# Altium PCB MAXstream.PcbDoc
Units mil, origin at the board's own origin, x right, y up, seen from the top; angles counter-clockwise.
Board outline not stored, 2 copper layers (Top Layer, Bottom Layer); 9 components, 0 nets, 36 pads, 6 vias.
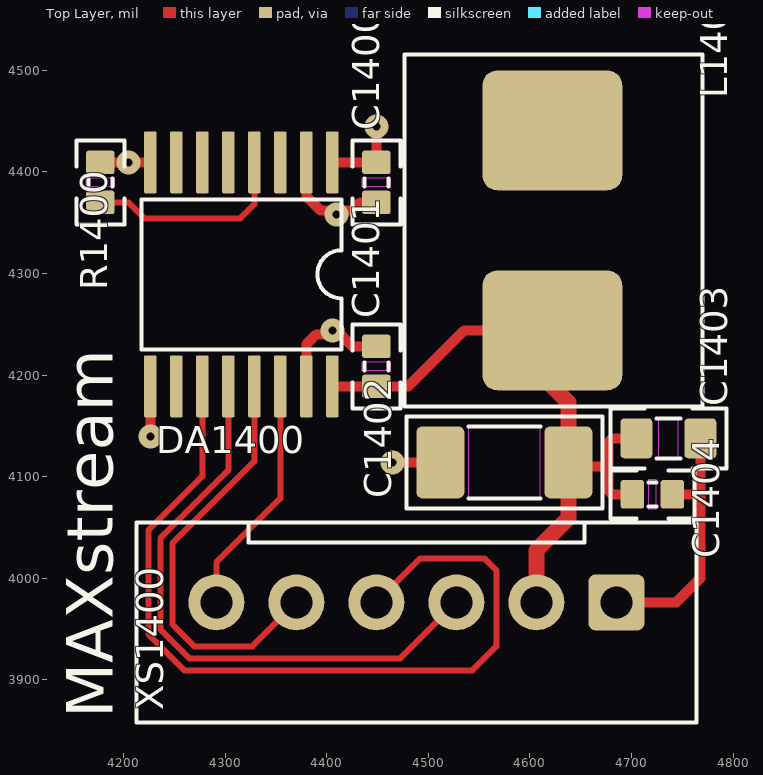
[diagram p0: Top Layer view]
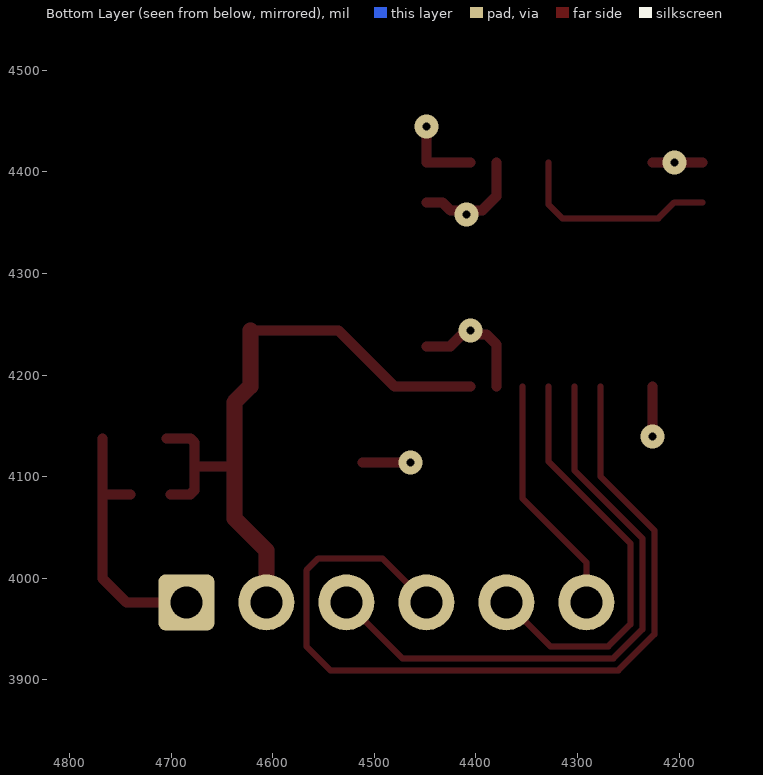
[diagram p1: Bottom Layer view, seen from below]

## Layer stack, top to bottom
Top Solder: solder mask 0.4, Solder Resist, Dk 3.5
Top Layer: signal copper 1.4
Dielectric 1: dielectric 12.6, FR-4, Dk 4.8
Bottom Layer: signal copper 1.4
Bottom Solder: solder mask 0.4, Solder Resist, Dk 3.5

## Design rules (kind name [scope] priority, off if disabled: settings)
RoomDefinition MAXstream [InComponentClass('Components Class 1')] p1: confinementstyle=ConfineIn formatcopy=TRUE lockcomponents=FALSE outline 4129.92,3803.15 4838.58,3803.15 4838.58,4551.18 4129.92,4551.18

## Components (designator, comment, footprint, x,y, rotation, side; value= is the part's Value field where it differs from the comment)
C1400 "0,1" CAP0402 4448.82,4389.76 r270 top
C1401 "0,1" CAP0402 4448.82,4208.66 r90 top
C1402 "47,0" CAP1206 4574.8,4114.17 r180 top
C1403 "2,2" CAP0603 4736.22,4137.8 r0 top
C1404 "0,1" CAP0402 4720.47,4082.68 r0 top
DA1400 "ISO7141" TSSOP16 4405.51,4409.45 r270 top
L1400 "10uH" IND2525 4622.05,4342.52 r270 top
R1400 "10K" RES0402 4177.17,4389.76 r90 top
XS1400 "MAXstream" MW-6M 4685.04,3976.38 r180 top

## Footprints (in the part's own frame and the unit in brackets; to place one, negate y for a bottom-side part, rotate by r counter-clockwise, add the part's x,y. Pads: shape width x height; smd on the part's side, far side on the other; paste and mask are expansions set on the pad)
CAP0402 [mm]
  rrect25% 0.59x0.72 smd: 1(-0.5,0) 2(0.5,0)
  Top Layer keep-out region: -0.1,0.36 -0.1,-0.36 0.1,-0.36 0.1,0.36
  silkscreen extent -1.05,-0.6 1.05,0.6, body extent -0.5,-0.25 0.5,0.25, height 0.49
CAP0603 [mm]
  rrect25% 0.8x1 smd: 1(-0.8,0) 2(0.8,0)
  Top Layer keep-out region: -0.25,0.5 -0.25,-0.5 0.25,-0.5 0.25,0.5
  silkscreen extent -1.45,-0.75 1.45,0.75, body extent -0.8,-0.4 0.8,0.4, height 0.65
CAP1206 [mm]
  rrect25% 1.2x1.8 smd: 1(-1.6,0) 2(1.6,0)
  Top Layer keep-out region: -0.9,-0.9 0.9,-0.9 0.9,0.9 -0.9,0.9
  silkscreen extent -2.45,-1.15 2.45,1.15, body extent -1.6,-0.8 1.6,0.8, height 1
IND2525 [mm]
  rrect25% 3x3.5 smd: 1(-2.5,0) 2(2.5,0)
  silkscreen extent -4.4,-3.7 4.4,3.75, body extent -3.68,-3.39 3.6,3.39, height 4.99
MW-6M [mm]
  rrect25% 1.4x1.4 hole 0.8: 1(0,0)
  round 1.4 hole 0.8: 2(2,0) 3(4,0) 4(6,0) 5(8,0) 6(10,0)
  silkscreen extent -2,-2 12,3, body extent -2,-1.75 12,2.75, height 6
RES0402 [mm]
  rrect25% 0.59x0.72 smd: 1(-0.5,0) 2(0.5,0)
  Top Layer keep-out region: -0.1,0.36 -0.1,-0.36 0.1,-0.36 0.1,0.36
  silkscreen extent -1.05,-0.6 1.05,0.6, body extent -0.5,-0.25 0.5,0.25, height 0.33
TSSOP16 [mm]
  rrect25% 1.55x0.32 smd: 1(0,0) 2(0,-0.65) 3(0,-1.3) 4(0,-1.95) 5(0,-2.6) 6(0,-3.25) 7(0,-3.9) 8(0,-4.55) 9(5.6,-4.55) 10(5.6,-3.9) 11(5.6,-3.25) 12(5.6,-2.6) 13(5.6,-1.95) 14(5.6,-1.3) 15(5.6,-0.65) 16(5.6,0)
  silkscreen extent 0.92,-4.77 4.67,0.23, body extent -0.45,-4.82 6.05,0.28, height 1.2

## Part data
C1400 C1401 C1404: library part CAP_0402, "Конденсатор чип"
C1402: library part CAP_1206, "Конденсатор чип"
C1403: library part CAP_0603, "Конденсатор чип"
DA1400: "Цифровой изолятор 3 вх 1 вых"
L1400: library part IND_2525, "Индуктивность чип"
R1400: library part RES_0402, "Резистор чип"
XS1400: library part Разъем6, "Разъем"

## Via types
v1: diameter 23.62, hole 7.87, Top Layer to Bottom Layer, tented both sides, 6 vias

## Nets (pads, with @x,y where several pads share a name; then routed paths per layer and width w, separated by ;. In a path a pad name is that pad's centre, name@x,y a point inside that pad or via, vN(x,y) a via of type N, cw(c..) or ccw(c..) an arc to the next point about the centre after c; other vN are vias at no path point)
pads on no net: C1400.1 C1400.2 C1401.1 C1401.2 C1402.1 C1402.2 C1403.1 C1403.2 C1404.1 C1404.2 DA1400.1 DA1400.2 DA1400.3 DA1400.4 DA1400.5 DA1400.6 DA1400.7 DA1400.8 DA1400.9 DA1400.10 DA1400.11 DA1400.12 DA1400.13 DA1400.14 DA1400.15 DA1400.16 L1400.1 L1400.2 R1400.1 R1400.2 XS1400.1 XS1400.2 XS1400.3 XS1400.4 XS1400.5 XS1400.6
copper on no net: | length 3678.8
  Top Layer w5.91: 4177.17,4370.08 4204.72,4370.08 4220.47,4354.33 4314.96,4354.33 4328.74,4368.11 4328.74,4409.45 ; 4277.56,4188.98 4277.56,4100.39 4224.41,4047.24 4224.41,3944.88 4259.84,3909.45 4543.31,3909.45 4566.93,3933.07 4566.93,4007.87 4555.12,4019.68 4492.13,4019.68 4448.82,3976.38 ; 4291.34,3976.38 4291.34,4015.75 4354.33,4078.74 4354.33,4188.98 ; 4303.15,4188.98 4303.15,4106.3 4236.22,4039.37 4236.22,3949.77 4264.73,3921.26 4472.44,3921.26 4527.56,3976.38 ; 4328.74,4188.98 4328.74,4115.19 4248.03,4034.48 4248.03,3954.67 4269.63,3933.07 4326.77,3933.07 4370.08,3976.38
  Top Layer w9.84: 4177.17,4409.45 4226.38,4409.45 ; v1(4226.38,4139.76) 4226.38,4188.98 ; 4379.92,4188.98 4379.92,4230.31 4389.76,4240.16 4413.39,4240.16 4425.2,4228.35 4448.82,4228.35 ; 4379.92,4409.45 4379.92,4375.98 4393.7,4362.2 4425.2,4362.2 4433.07,4370.08 4448.82,4370.08 ; 4405.51,4188.98 4448.82,4188.98 4480.32,4188.98 4535.43,4244.09 4622.05,4244.09 ; 4405.51,4409.45 4448.82,4409.45 v1(4448.82,4444.88) ; v1(4464.57,4114.17) 4511.81,4114.17 ; 4641.73,4110.24 4677.17,4110.24 ; 4685.04,3976.38 4744.09,3976.38 4767.72,4000 4767.72,4082.68 ; 4700.79,4082.68 4681.1,4082.68 4677.17,4086.61 4677.17,4110.24 ; 4704.72,4137.8 4681.1,4137.8 4677.17,4133.86 4677.17,4110.24 ; 4740.16,4082.68 4767.72,4082.68 ; 4767.72,4137.8 4767.72,4082.68
  Top Layer w15.75: 4606.3,3976.38 4606.3,4027.56 4637.8,4059.05 4637.8,4114.17 4637.8,4173.23 4622.05,4188.98 4622.05,4244.09
  other v1: 4405.51,4244.09 4409.45,4358.27 4204.72,4409.45